# EAGLE board CT_schematic (EAGLE 7.6.0)

Size 100 x 80 mm. Coordinates in mm from the lower left corner, seen from the top.
Outline: 0,0 100,0 100,80 0,80 0,0
Copper layers (1*16): Top 0.035mm / dielectric 1.5mm / Bottom 0.035mm
Design rules "default": minimum track width 10mil, minimum drill 24mil, track to track 8mil, track to pad 8mil, pad to pad 8mil, via to via 8mil, smd to smd 8mil, copper to edge 40mil, drill to drill 8mil, minimum pad ring 10mil, minimum via ring 8mil, stop-mask expansion 4mil, vias tented up to drill 0mil, thermal gap 10mil

## Footprints (pad centres in the part's own frame; a part is rotated, then mirrored left to right if it is on the bottom)
C0603 = smd 0.8 x 0.8: 1 -0.762,0; 2 0.762,0
C0402 = smd 0.5 x 0.5: 1 -0.508,0; 2 0.508,0
C1210 = smd 1.2 x 2.5: 1 -1.524,0; 2 1.524,0
EXV-9H = smd 3.505 x 1.676: 1 -2.857,0; 2 2.857,0
L0603 = smd 0.8 x 0.8: 1 -0.762,0; 2 0.762,0
PJ-037B_PACKAGE = drill 3.7 square: 1 12,0 | drill 3.2 square: 2 6,0
R0603 = smd 0.8 x 0.8: 1 -0.762,0; 2 0.762,0
UFQFPN48 = smd 0.559 x 0.305: 1 -3.375,2.751; 2 -3.375,2.251; 3 -3.375,1.75; 4 -3.375,1.25; 5 -3.375,0.75; 6 -3.375,0.25; 7 -3.375,-0.25; 8 -3.375,-0.75; 9 -3.375,-1.25; 10 -3.375,-1.75; 11 -3.375,-2.251; 12 -3.375,-2.751; 25 3.375,-2.751; 26 3.375,-2.251; 27 3.375,-1.75; 28 3.375,-1.25; 29 3.375,-0.75; 30 3.375,-0.25; 31 3.375,0.25; 32 3.375,0.75; 33 3.375,1.25; 34 3.375,1.75; 35 3.375,2.251; 36 3.375,2.751 | smd 0.305 x 0.559: 13 -2.751,-3.375; 14 -2.251,-3.375; 15 -1.75,-3.375; 16 -1.25,-3.375; 17 -0.75,-3.375; 18 -0.25,-3.375; 19 0.25,-3.375; 20 0.75,-3.375; 21 1.25,-3.375; 22 1.75,-3.375; 23 2.251,-3.375; 24 2.751,-3.375; 37 2.751,3.375; 38 2.251,3.375; 39 1.75,3.375; 40 1.25,3.375; 41 0.75,3.375; 42 0.25,3.375; 43 -0.25,3.375; 44 -0.75,3.375; 45 -1.25,3.375; 46 -1.75,3.375; 47 -2.251,3.375; 48 -2.751,3.375 | smd 5.588 x 5.588: 49 0,0
TST-110-05-T-D-RA = drill 1 pad 1.7 square: 1 0,0 | drill 1 pad 1.7: 2 0,2.54; 3 2.54,0; 4 2.54,2.54; 5 5.08,0; 6 5.08,2.54; 7 7.62,0; 8 7.62,2.54; 9 10.16,0; 10 10.16,2.54; 11 12.7,0; 12 12.7,2.54; 13 15.24,0; 14 15.24,2.54; 15 17.78,0; 16 17.78,2.54; 17 20.32,0; 18 20.32,2.54; 19 22.86,0; 20 22.86,2.54
DFN8-S = smd 0.6 x 0.4: 1 -2.69,1.905; 2 -2.69,0.635; 3 -2.69,-0.635; 4 -2.69,-1.905; 5 2.69,-1.905; 6 2.69,-0.635; 7 2.69,0.635; 8 2.69,1.905
88-00153-02 = smd 1.6 x 1.6: 1 -0.2,0; 13 15,0; 20 15,9.2; 32 -0.2,9.2 | smd 0.8 x 1.6: 2 1.4,0; 3 2.6,0; 4 3.8,0; 5 5,0; 6 6.2,0; 7 7.4,0; 8 8.6,0; 9 9.8,0; 10 11,0; 11 12.2,0; 12 13.4,0; 21 13.4,9.2; 22 12.2,9.2; 23 11,9.2; 24 9.8,9.2; 25 8.6,9.2; 26 7.4,9.2; 27 6.2,9.2; 28 5,9.2; 29 3.8,9.2; 30 2.6,9.2; 31 1.4,9.2; 49 17.8,0 | smd 1.6 x 0.8: 14 15,1.6; 15 15,2.8; 16 15,4; 17 15,5.2; 18 15,6.4; 19 15,7.6; 33 -0.2,7.6; 34 -0.2,6.4; 35 -0.2,5.2; 36 -0.2,4; 37 -0.2,2.8; 38 -0.2,1.6 | smd 2 x 2: 39 3.5,3; 40 7.4,3; 41 11.3,3; 42 11.3,6.2; 43 7.4,6.2; 44 3.5,6.2 | smd 0.5 x 0.5: 45 1.55,3.85; 46 1.55,2.75; 47 1.55,1.65 | smd 0.8 x 0.8: 48 16.6,-0.4
USB-A-H = drill 0.914: 1 2.718,3.493; 2 2.718,1.003; 3 2.718,-1.003; 4 2.718,-3.493 | drill 2.311: 5 0,-6.566; 6 0,6.566
SOT143B = smd 1 x 0.7: 1 -0.75,-1 | smd 0.6 x 0.7: 2 0.95,-1; 3 0.95,1; 4 -0.95,1
ASEK = smd 1.4 x 1: 1 -1.1,-0.8; 2 1.1,-0.8; 3 1.1,0.8; 4 -1.1,0.8
ASFL1 = smd 1.7 x 1.5: 1 -1.27,-1.1; 2 1.27,-1.1; 3 1.27,1.1; 4 -1.27,1.1
WSON-8 = smd 0.3 x 0.6: 1 -0.75,0; 2 0.05,0; 3 0.85,0; 4 1.65,0; 5 1.65,3.8; 6 0.85,3.8; 7 0.05,3.8; 8 -0.75,3.8 | smd 3 x 2.6: PAD 0.45,1.9
SON-6 = smd 0.55 x 0.3: 1 -0.355,0.5 | smd 0.52 x 0.3: 2 -0.37,0; 3 -0.37,-0.5; 4 0.37,-0.5; 5 0.37,0; 6 0.37,0.5
SW_4-1437565-2 = smd 1.4 x 2.1: 1 -2.23,4.55; 2 -2.23,-4.55; 3 2.23,4.55; 4 2.23,-4.55
LGM67K-G1J2-24-Z = smd 0.8 x 1.4: A -2,0; C 0,0
NC7SZ125M5X = smd 1.3 x 0.7: 1 -1.3,0.95; 2 -1.3,0; 3 -1.3,-0.95; 4 1.3,-0.95; 5 1.3,0.95

## Placement (x,y rotation side)
C1  1e-07  [C0603]  -22.86,69.85 0 top  (outside the outline)
C2  1e-07  [C0603]  -26.67,69.85 0 top  (outside the outline)
C3  1e-07  [C0603]  -30.48,69.85 0 top  (outside the outline)
C4  1e-07  [C0603]  -34.29,69.85 0 top  (outside the outline)
C5  4.7e-06  [C0603]  -19.05,69.85 0 top  (outside the outline)
C6  1e-07  [C0603]  -38.1,69.85 0 top  (outside the outline)
C7  1e-08  [C0603]  -41.91,69.85 0 top  (outside the outline)
C8  1e-06  [C0603]  -45.72,69.85 0 top  (outside the outline)
C9  1e-07  [C0402]  -34.29,74.93 0 top  (outside the outline)
C10  1e-07  [C0402]  -38.1,74.93 0 top  (outside the outline)
C11  1e-08  [C0402]  -41.91,74.93 0 top  (outside the outline)
C12  1e-07  [C0402]  -45.72,74.93 0 top  (outside the outline)
C13  1e-06  [C0603]  -49.53,69.85 0 top  (outside the outline)
C14  1e-07  [C0402]  -49.53,74.93 0 top  (outside the outline)
C15  1e-06  [C0603]  -53.34,69.85 0 top  (outside the outline)
C16  1e-08  [C0402]  -53.34,74.93 0 top  (outside the outline)
C17  1e-08  [C0402]  -57.15,74.93 0 top  (outside the outline)
C18  1e-08  [C0402]  -60.96,74.93 0 top  (outside the outline)
C19  1e-05  [C1210]  -50.8,52.07 0 top  (outside the outline)
C20  1e-05  [C1210]  -57.15,52.07 0 top  (outside the outline)
C21  1e-07  [C0402]  -64.77,74.93 0 top  (outside the outline)
C22  0.0001  [EXV-9H]  -17.78,52.07 0 top  (outside the outline)
C23  0.0001  [EXV-9H]  -29.21,52.07 0 top  (outside the outline)
C24  1e-08  [C0402]  -68.58,74.93 0 top  (outside the outline)
C25  1e-08  [C0402]  -72.39,74.93 0 top  (outside the outline)
C26  1e-08  [C0402]  -15.24,80.01 0 top  (outside the outline)
F1  240.0  [L0603]  -57.15,69.85 0 top  (outside the outline)
J1  PJ-037B  [PJ-037B_PACKAGE]  -27.94,24.13 0 top  (outside the outline)
R1  10000.0  [R0603]  -36.83,58.42 0 top  (outside the outline)
R2  1000.0  [R0603]  -60.96,69.85 0 top  (outside the outline)
R3  1600.5  [R0603]  -64.77,69.85 0 top  (outside the outline)
R4  4700.0  [R0603]  -68.58,69.85 0 top  (outside the outline)
R5  4700.0  [R0603]  -72.39,69.85 0 top  (outside the outline)
R6  2200.0  [R0603]  -15.24,74.93 0 top  (outside the outline)
R7  2200.0  [R0603]  -19.05,74.93 0 top  (outside the outline)
R8  10000.0  [R0603]  -41.91,58.42 0 top  (outside the outline)
R9  10000.0  [R0603]  -46.99,58.42 0 top  (outside the outline)
R10  10000.0  [R0603]  -52.07,58.42 0 top  (outside the outline)
R11  10000.0  [R0603]  -57.15,58.42 0 top  (outside the outline)
R12  10000.0  [R0603]  -62.23,58.42 0 top  (outside the outline)
R13  10000.0  [R0603]  -67.31,58.42 0 top  (outside the outline)
R14  10000.0  [R0603]  -72.39,58.42 0 top  (outside the outline)
R15  10000.0  [R0603]  -15.24,64.77 0 top  (outside the outline)
R16  10000.0  [R0603]  -20.32,64.77 0 top  (outside the outline)
R17  10000.0  [R0603]  -25.4,64.77 0 top  (outside the outline)
R18  10000.0  [R0603]  -30.48,64.77 0 top  (outside the outline)
R19  34000.0  [R0603]  -35.56,64.77 0 top  (outside the outline)
R20  34000.0  [R0603]  -40.64,64.77 0 top  (outside the outline)
R21  34000.0  [R0603]  -45.72,64.77 0 top  (outside the outline)
R22  34000.0  [R0603]  -50.8,64.77 0 top  (outside the outline)
R23  34000.0  [R0603]  -55.88,64.77 0 top  (outside the outline)
R24  34000.0  [R0603]  -60.96,64.77 0 top  (outside the outline)
R25  10000.0  [R0603]  -66.04,64.77 0 top  (outside the outline)
R26  100000.0  [R0603]  -21.59,58.42 0 top  (outside the outline)
R27  2231.0  [R0603]  -22.86,74.93 0 top  (outside the outline)
R28  1000.0  [R0603]  -26.67,74.93 0 top  (outside the outline)
R29  10000.0  [R0603]  -71.12,64.77 0 top  (outside the outline)
R30  10000.0  [R0603]  -15.24,69.85 0 top  (outside the outline)
R31  9100.0  [R0603]  -30.48,74.93 0 top  (outside the outline)
R32  680000.0  [R0603]  -26.67,58.42 0 top  (outside the outline)
R33  120000.0  [R0603]  -31.75,58.42 0 top  (outside the outline)
U1  STM32L100C6U6A  [UFQFPN48]  -38.1,35.56 0 top  (outside the outline)
U2  TST-110-05-T-D-RA  [TST-110-05-T-D-RA]  -46.99,41.91 0 top  (outside the outline)
U3  24AA512-I/MF  [DFN8-S]  -58.42,22.86 0 top  (outside the outline)
U4  88-00153-02  [88-00153-02]  -57.15,2.54 0 top  (outside the outline)
U5  61400416021  [USB-A-H]  -19.05,8.89 0 top  (outside the outline)
U6  prtr5v0u2ax  [SOT143B]  -27.94,80.01 0 top  (outside the outline)
U7  ASEK-32.768KHz-ECST  [ASEK]  -66.04,44.45 0 top  (outside the outline)
U8  ASFL1-25MHZ-NCS  [ASFL1]  -57.15,35.56 0 top  (outside the outline)
U9  LP3878SDX-ADJ/NOPB  [WSON-8]  -30.48,34.29 0 top  (outside the outline)
U10  TPS3895ADRYR  [SON-6]  -31.75,78.74 0 top  (outside the outline)
U11  4-1437565-2  [SW_4-1437565-2]  -44.45,24.13 0 top  (outside the outline)
U12  Q65110A2395  [LGM67K-G1J2-24-Z]  -39.37,52.07 0 top  (outside the outline)
U13  nc7sz125m5x  [NC7SZ125M5X]  -62.23,50.8 0 top  (outside the outline)
U14  nc7sz125m5x  [NC7SZ125M5X]  -68.58,50.8 0 top  (outside the outline)
U15  nc7sz125m5x  [NC7SZ125M5X]  -15.24,58.42 0 top  (outside the outline)

## Library data of the parts
C1-C26 F1 J1 R1-R33 U1-U15 = circuit_tree

## Nets
CLK_U1_3: U1.3 U7.3
CLK_U1_5: U1.5 U8.3
GND: C1.2 C2.2 C3.2 C4.2 C5.2 C6.2 C7.2 C8.2 C9.2 C10.2 C11.2 C12.2 C13.2 C14.2 C15.2 C16.2 C17.2 C18.2 C19.2 C20.2 C21.2 C22.2 C23.2 C24.2 C25.2 C26.2 J1.2 R2.2 R8.2 R14.2 R15.2 R16.2 R28.2 R31.2 R33.2 U1.8 U1.23 U1.35 U1.47 U1.49 U2.4 U2.6 U2.8 U2.10 U2.12 U2.14 U2.16 U2.18 U2.20 U3.4 U3.7 U4.1 U4.9 U4.13 U4.14 U4.15 U4.16 U4.17 U4.18 U4.19 U4.20 U4.21 U4.22 U4.23 U4.24 U4.25 U4.26 U4.27 U4.31 U4.32 U4.39 U4.40 U4.41 U4.42 U4.43 U4.44 U4.49 U5.4 U5.5 U5.6 U6.1 U7.2 U8.2 U9.3 U9.PAD U10.2 U12.C U13.2 U13.3 U14.1 U14.3 U15.1 U15.3
NET_U1_1: C6.1 U1.1
NET_U1_7: R5.1 U1.7 U15.4
NET_U1_9: C7.1 C8.1 F1.1 U1.9
NET_U1_42: R6.1 U1.42 U3.6
NET_U1_43: R7.1 U1.43 U3.5
NET_U1_44: R8.1 U1.44
NET_U1_45: R3.1 U1.45 U12.A
NET_U1_46: R1.1 U1.46 U11.3 U11.4
NET_U2_19: R14.1 U2.19
NET_U3_1: R15.1 U3.1
NET_U3_2: R16.1 U3.2
NET_U3_3: R17.1 U3.3
NET_U4_2: R21.1 U4.2
NET_U4_6: R25.1 U4.6
NET_U4_10: R4.1 U4.10 U14.4
NET_U4_11: R18.1 U4.11
NET_U4_34: R20.1 U4.34
NET_U6_4: U5.1 U6.4
NET_U9_1: C18.1 U9.1
NET_U9_6: R27.2 R28.1 U9.6
NET_U9_8: R26.1 U9.8
NET_U10_1: R30.1 R31.1 U10.1
NET_U10_3: R32.2 R33.1 U10.3
NET_U10_4: R29.1 U10.4 U13.4 U14.2 U15.2
NET_U11_1: R2.1 U11.1 U11.2
PROC_SPI1_MISO: R19.1 U1.16 U4.35
PROC_SPI1_MOSI: R23.1 U1.17 U4.37
PROC_SPI1_NSS: R22.1 U1.14 U4.38
PROC_SPI1_SCK: R24.1 U1.15 U4.36
PROC_SYS_JTCK_SWCLK: R12.1 U1.37 U2.9
PROC_SYS_JTDI: R10.1 U1.38 U2.5
PROC_SYS_JTDO_TRACESWO: U1.39 U2.13
PROC_SYS_JTMS_SWDIO: R11.1 U1.34 U2.7
PROC_SYS_JTRST: R9.1 U1.40 U2.3
PROC_USB_DM: U1.32 U5.2 U6.3
PROC_USB_DP: U1.33 U5.3 U6.2
RST_OUT_U2_SRESET_B: R13.1 U2.15 U13.1
VCC_S1_14V6: C19.1 C22.1 C23.1 J1.1 R26.2 U9.4
VCC_TIER1_3V3: C1.1 C2.1 C3.1 C4.1 C5.1 C9.1 C10.1 C11.1 C12.1 C13.1 C14.1 C15.1 C16.1 C17.1 C20.1 C21.1 C24.1 C25.1 C26.1 F1.2 R1.2 R3.2 R4.2 R5.2 R6.2 R7.2 R9.2 R10.2 R11.2 R12.2 R13.2 R17.2 R18.2 R19.2 R20.2 R21.2 R22.2 R23.2 R24.2 R25.2 R27.1 R29.2 R30.2 R32.1 U1.24 U1.36 U1.48 U2.1 U2.2 U3.8 U4.12 U4.33 U7.4 U8.4 U9.5 U10.6 U13.5 U14.5 U15.5

## Tracks (layer width: path | path; a pad name or v marks a point on that pad's centre or on a via)
CLK_U1_3  (1 unrouted)
CLK_U1_5  (1 unrouted)
GND  (92 unrouted)
NET_U1_1  (1 unrouted)
NET_U1_7  (2 unrouted)
NET_U1_9  (3 unrouted)
NET_U1_42  (2 unrouted)
NET_U1_43  (2 unrouted)
NET_U1_44  (1 unrouted)
NET_U1_45  (2 unrouted)
NET_U1_46  (3 unrouted)
NET_U2_19  (1 unrouted)
NET_U3_1  (1 unrouted)
NET_U3_2  (1 unrouted)
NET_U3_3  (1 unrouted)
NET_U4_2  (1 unrouted)
NET_U4_6  (1 unrouted)
NET_U4_10  (2 unrouted)
NET_U4_11  (1 unrouted)
NET_U4_34  (1 unrouted)
NET_U6_4  (1 unrouted)
NET_U9_1  (1 unrouted)
NET_U9_6  (2 unrouted)
NET_U9_8  (1 unrouted)
NET_U10_1  (2 unrouted)
NET_U10_3  (2 unrouted)
NET_U10_4  (4 unrouted)
NET_U11_1  (2 unrouted)
PROC_SPI1_MISO  (2 unrouted)
PROC_SPI1_MOSI  (2 unrouted)
PROC_SPI1_NSS  (2 unrouted)
PROC_SPI1_SCK  (2 unrouted)
PROC_SYS_JTCK_SWCLK  (2 unrouted)
PROC_SYS_JTDI  (2 unrouted)
PROC_SYS_JTDO_TRACESWO  (1 unrouted)
PROC_SYS_JTMS_SWDIO  (2 unrouted)
PROC_SYS_JTRST  (2 unrouted)
PROC_USB_DM  (2 unrouted)
PROC_USB_DP  (2 unrouted)
RST_OUT_U2_SRESET_B  (2 unrouted)
VCC_S1_14V6  (5 unrouted)
VCC_TIER1_3V3  (58 unrouted)